# Altium PCB M_Tas3.PcbDoc (part 1 of 2)
Units mm, origin at the board's own origin, x right, y up, seen from the top; angles counter-clockwise.
Board outline 100.84 x 81.79 mm, 2 copper layers (Top Layer, Bottom Layer); 78 components, 39 nets, 214 pads, 61 vias.
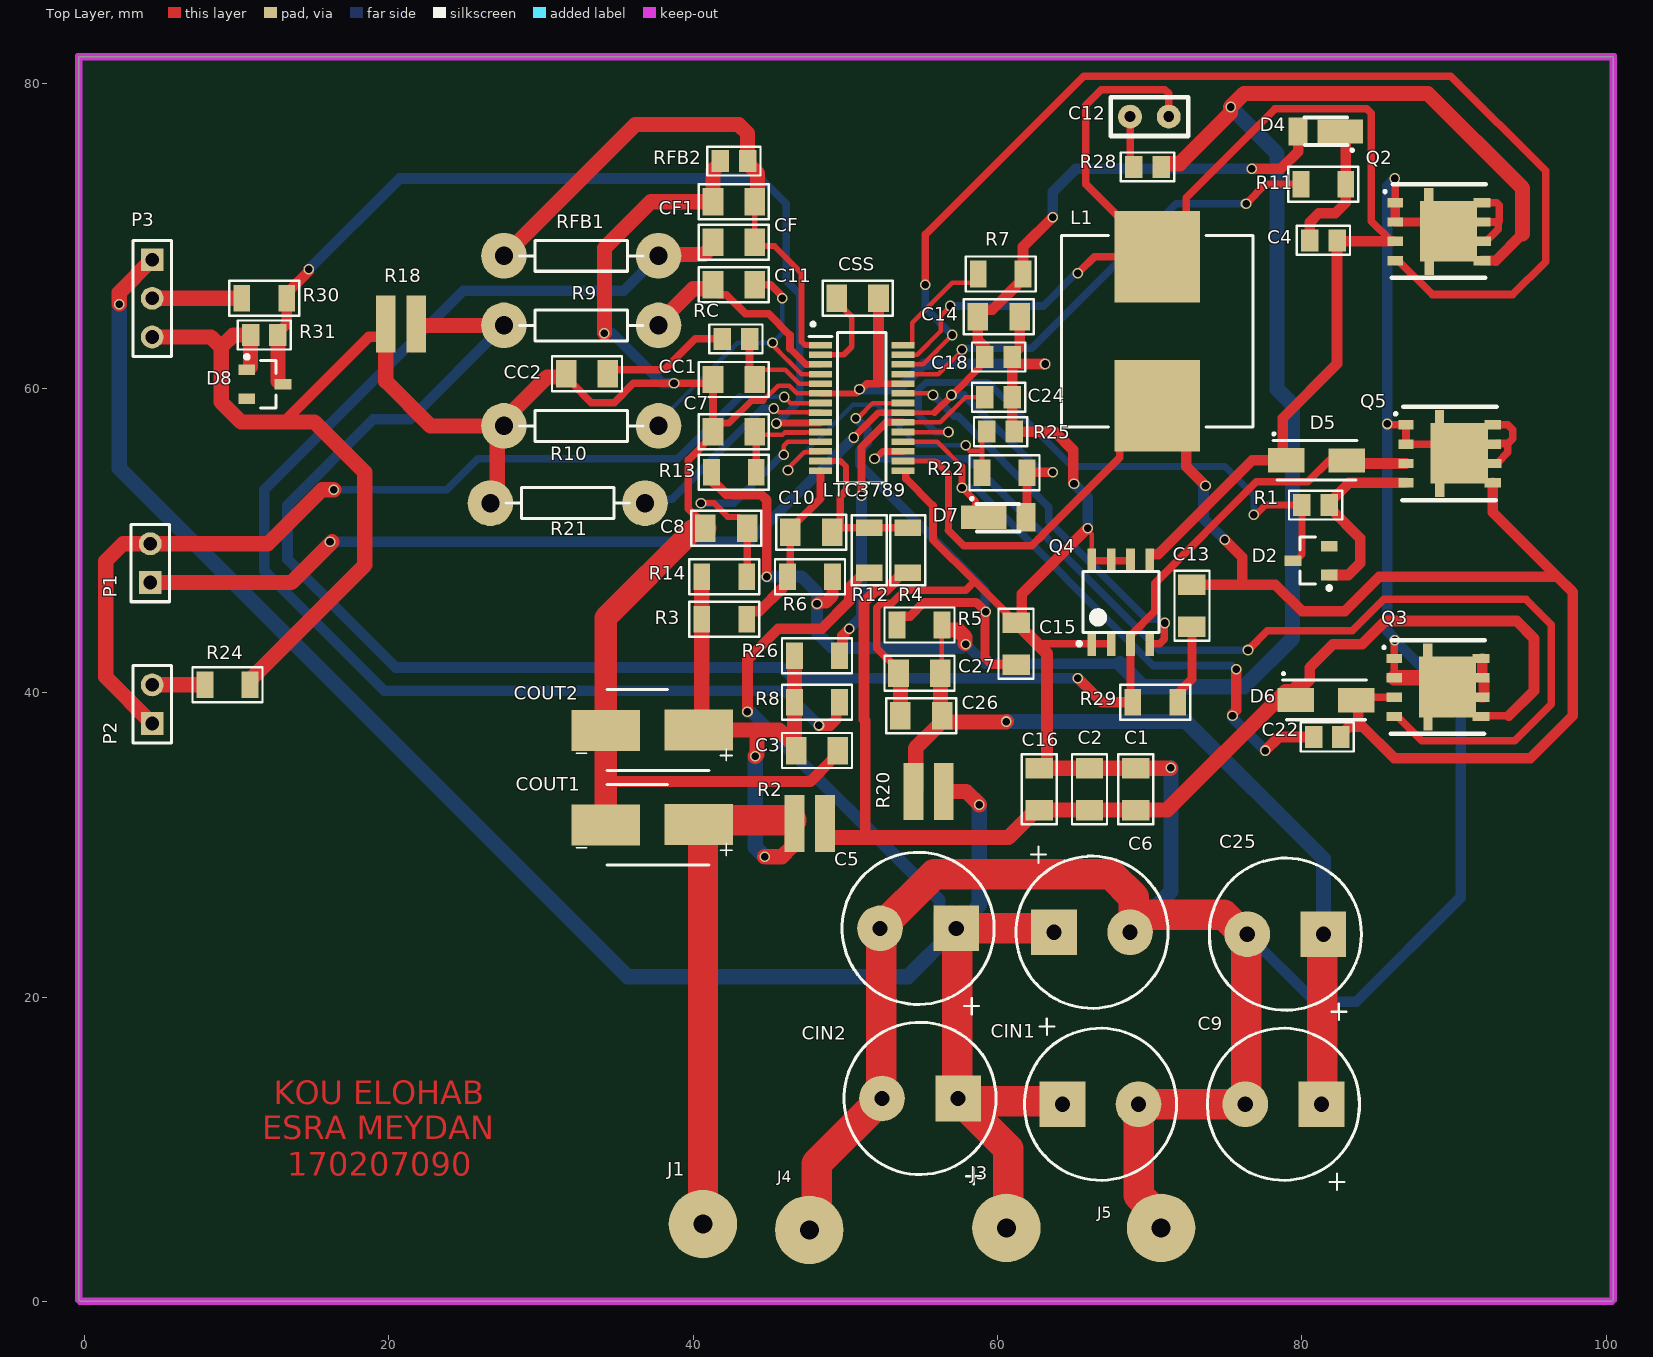
[diagram p0: Top Layer view]
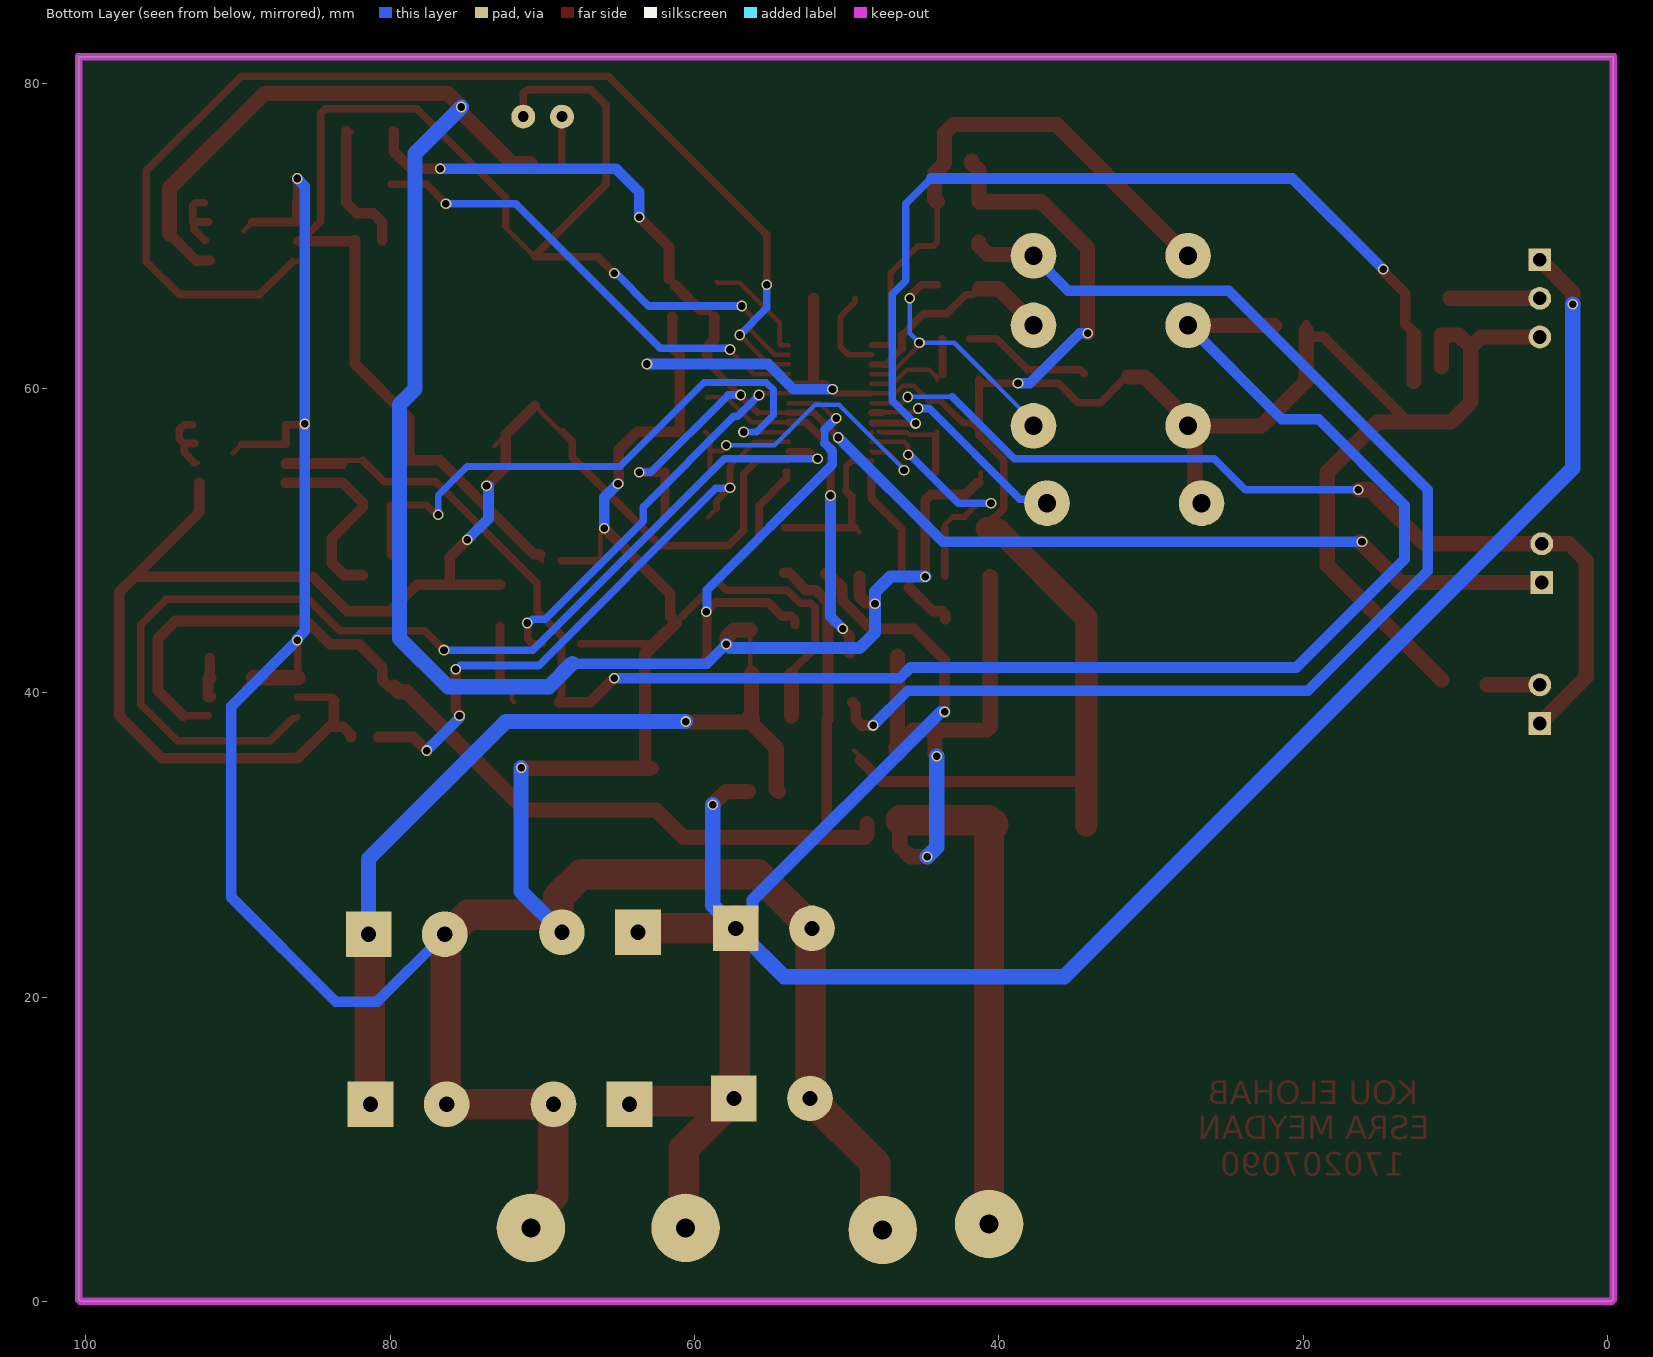
[diagram p1: Bottom Layer view, seen from below]
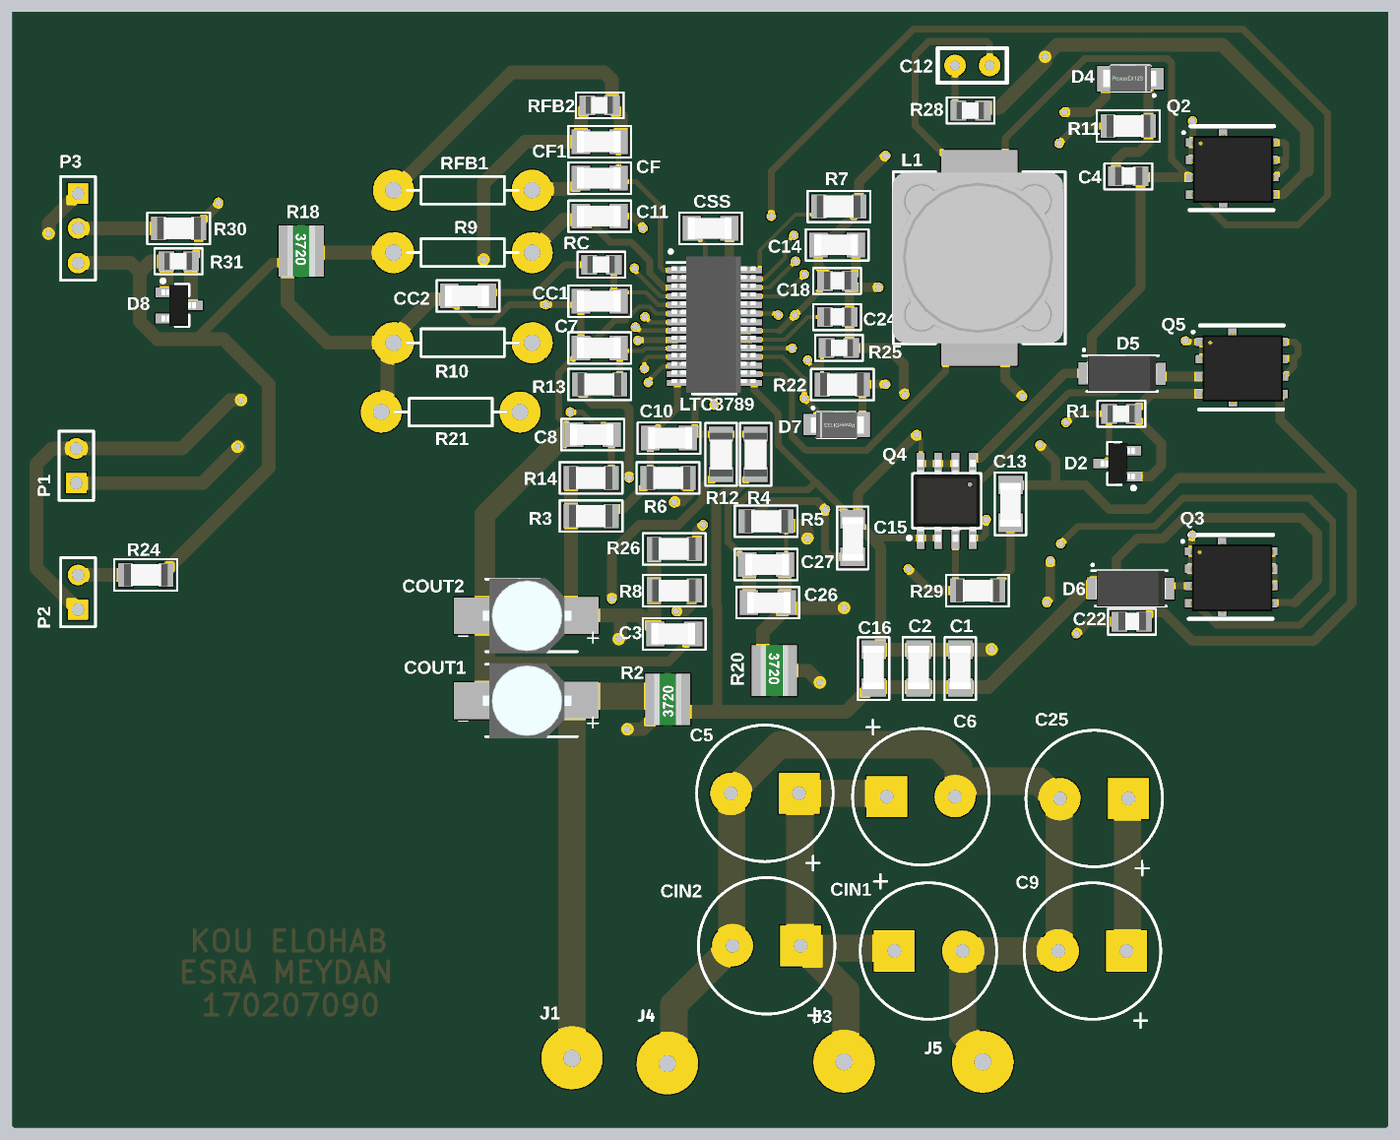
[diagram p2: 3D render of the assembled board from above, using the file's embedded part models]

## Layer stack, top to bottom
Top Solder: solder mask 0.0102, Solder Resist, Dk 3.5
Top Layer: signal copper 0.0356
Dielectric 1: dielectric 0.32, FR-4, Dk 4.8
Bottom Layer: signal copper 0.0356
Bottom Solder: solder mask 0.0102, Solder Resist, Dk 3.5

## Board outline
-0.254,0 -0.381,0.127 -0.381,81.788 100.457,81.788 100.457,0.127 100.33,0

## Design rules (kind name [scope] priority, off if disabled: settings)
Clearance [All] p1: gap=0.254 ignorepadtopadclearanceinfootprint=FALSE
PolygonConnect [All] p1: connectstyle=Relief reliefconductorwidth=0.254 reliefentries=4 polygonreliefangle="90 Angle" airgapwidth=0.254
RoutingVias [All] p1: holewidth=0.711 width=1.27 viastyle="Through Hole" minholewidth=0.711 minwidth=1.27 maxholewidth=0.711 maxwidth=1.27
ShortCircuit [All] p1: allowed=TRUE
SolderMaskExpansion [All] p1: expansion=0.102 istentingtop=FALSE
Width [All] p1: maxlimit=2 minlimit=0.3 preferedwidth=0.3
29 further rules are at their usual default settings.

## Components (designator, comment, footprint, x,y, rotation, side; value= is the part's Value field where it differs from the comment)
C1 "22uF" CAPC3216X190N(1206) 69.088,33.655 r270 top
C2 "22uF" CAPC3216X190N(1206) 66.04,33.655 r270 top
C3 "100nF opt" CAPC3216X190N(1206) 48.133,36.195 r0 top
C4 "220nF" CAPC2012X14N(0805) 81.407,69.723 r0 top value=100nF
C5 "3.3uF" RAD5X10X16 57.277,24.511 r180 top
C6 "3.3uF" RAD5X10X16 63.707,24.257 r0 top
C7 "100nF opt" CAPC3216X190N(1206) 42.672,57.15 r0 top
C8 "100nF opt" CAPC3216X190N(1206) 42.164,50.8 r0 top
C9 "3.3uF" RAD5X10X16 81.28,12.954 r180 top
C10 "2.2uF" CAPC3216X190N(1206) 47.752,50.546 r180 top
C11 "100nF opt" CAPC3216X190N(1206) 42.672,66.802 r0 top
C12 "390pF" 2.54X5.5MM 68.707,77.851 r0 top value=220pF
C13 "1800pF" CAPC3216X190N(1206) 72.771,45.72 r90 top
C14 "0.1uF" CAPC3216X190N(1206) 60.071,64.696 r0 top
C15 "1uF" CAPC3216X190N(1206) 61.214,43.222 r90 top
C16 "22uF" CAPC3216X190N(1206) 62.738,33.655 r270 top
C18 "10uF" CAPC2012X14N(0805) 60.071,62.054 r0 top value=100nF
C22 "220nF" CAPC2012X14N(0805) 81.661,37.084 r0 top value=100nF
C24 "1uF" CAPC2012X14N(0805) 60.071,59.411 r0 top value=100nF
C25 "3.3uF" RAD5X10X16 81.407,24.13 r180 top
C26 "100nF opt" CAPC3216X190N(1206) 54.991,38.481 r180 top
C27 "100nF opt" CAPC3216X190N(1206) 54.864,41.275 r180 top
CC1 "1nF" CAPC3216X190N(1206) 42.672,60.579 r0 top
CC2 "10nF" CAPC3216X190N(1206) 33.02,60.96 r0 top
CF "100nF opt" CAPC3216X190N(1206) 42.672,69.596 r0 top
CF1 "100nF opt" CAPC3216X190N(1206) 42.672,72.263 r0 top
CIN1 "270uF" RAD5X10X16 64.262,12.954 r0 top
CIN2 "opt" RAD5X10X16 57.404,13.335 r180 top
COUT1 "330uF" OSCON 36.322,31.623 r180 top
COUT2 "330uF opt" OSCON 36.322,37.846 r180 top
CSS "10nF" CAPC3216X190N(1206) 50.8,65.913 r0 top
D2 "BAS16" BZX5V1/SOT23 81.788,47.728 r180 top
D4 "DFLS160" DFLS160 81.026,77.597 r180 top
D5 "B240A" B240A 79.883,55.056 r0 top
D6 "B240A" B240A 80.516,39.297 r0 top
D7 "DFLS160" DFLS160 60.579,50.8 r0 top
D8 "BZX5V1" BZX5V1/SOT23 10.668,61.214 r0 top
J1 "VOUT" I/O 40.64,5.08 r0 top
J3 "VIN" I/O 60.579,4.826 r0 top
J4 "GND" I/O 47.625,4.699 r0 top
J5 "GND" I/O 70.739,4.826 r0 top
L1 "4.7uH" 4.7UH 70.485,63.754 r270 top
LTC3789 "LTC3789" LTC3789 47.625,62.738 r0 top
P1 "Header 2" HDR1X2 4.318,47.244 r90 top
P2 "Header 2" HDR1X2 4.445,37.973 r90 top
P3 "Header 3" HDR1X3 4.445,68.453 r270 top
Q2 "Si7884" MOSFET 87.757,68.326 r0 top
Q3 "SIR410" MOSFET 87.69,38.372 r0 top
Q4 "Si4840" SOIC-8-SI4840 66.294,42.672 r90 top
Q5 "SIR410" MOSFET 88.459,53.721 r0 top
R1 "5.6" RESC2013X70N(0805) 80.899,52.324 r180 top
R2 "0.01" SUSUMU 46.482,33.147 r0 top
R3 "100" RESC3216X84N(1206) 42.037,44.831 r180 top value=100K
R4 "100" RESC3216X84N(1206) 54.102,49.354 r270 top value=100K
R5 "15" RESC3216X84N(1206) 54.864,44.45 r0 top value=100K
R6 "10 opt" RESC3216X84N(1206) 47.674,47.625 r0 top value=100K
R7 "100K" RESC3216X84N(1206) 60.198,67.515 r180 top
R8 "10" RESC3216X84N(1206) 48.133,39.37 r180 top value=100K
R9 "1.2K" AXIAL0.4 27.559,64.135 r0 top
R10 "1.2K" AXIAL0.4 27.559,57.531 r0 top
R11 "10" RESC3216X84N(1206) 81.407,73.406 r0 top value=100K
R12 "10 opt" RESC3216X84N(1206) 51.562,49.354 r270 top value=100K
R13 "100" RESC3216X84N(1206) 42.672,54.483 r180 top value=100K
R14 "100" RESC3216X84N(1206) 42.037,47.625 r180 top value=100K
R18 "0.01" SUSUMU 21.971,62.484 r180 top
R20 "0.004" SUSUMU 56.642,31.75 r180 top
R21 "121K" AXIAL0.4 26.67,52.451 r0 top
R22 "10 opt" RESC3216X84N(1206) 60.452,54.458 r180 top value=100K
R24 "10K" RESC3216X84N(1206) 9.398,40.513 r0 top value=100K
R25 "0" RESC2013X70N(0805) 60.198,57.15 r0 top
R26 "10" RESC3216X84N(1206) 48.133,42.418 r180 top value=100K
R28 "5.6" RESC2013X70N(0805) 69.85,74.549 r180 top
R29 "3.6" RESC3216X84N(1206) 70.358,39.37 r0 top value=100K
R30 "33K" RESC3216X84N(1206) 11.811,65.913 r0 top value=100K
R31 "12.1K" RESC2013X70N(0805) 11.811,63.5 r180 top
RC "14.7K" RESC2013X70N(0805) 42.799,63.246 r180 top
RFB1 "113K" AXIAL0.4 37.719,68.707 r180 top
RFB2 "8.2K" RESC2013X70N(0805) 42.672,74.93 r180 top

## Footprints (in the part's own frame and the unit in brackets; to place one, negate y for a bottom-side part, rotate by r counter-clockwise, add the part's x,y. Pads: shape width x height; smd on the part's side, far side on the other; paste and mask are expansions set on the pad)
2.54X5.5MM [mil] "Body 5X2.54mm, Pitch:2.54mm"
  round 62 hole 28: 1(0,0) 2(100,0)
  silkscreen extent -50,-50 150,50
4.7UH [mm] "Precision Wire Wound Inductor, 2-Leads, Body 12,60x10,00mm, IPC Medium Density"
  rect 6x5.6 smd: 1(-4.9,0) 2(4.9,0)
  silkscreen extent -6.3,-6.3 6.3,6.3, body extent -6.25,-6.35 6.25,6.15, height 6
AXIAL0.4 [mm] "body:3.5 X 10 mm( D  x L ) Pitch:10.16 mm (400mil)"
  round 3 hole 1.2: 1(0,0) 2(10.16,0)
  silkscreen extent 1.02,-1.02 9.14,1.02
B240A [mm]
  rect 2.4x1.6 smd: 1(-0.93,0.225) 2(3.05,0.2)
  silkscreen extent -1.8,-1.08 3.72,1.99, body extent -1.52,-1.08 3.67,1.53, height 2.3
BZX5V1/SOT23 [mm] "SOT23, 3-Leads, Body 2,95x2,48mm, Pitch 0,95mm, IPC Medium Density"
  rect 1.1x0.7 smd: 1(0,0) 2(0,-1.9) 3(2.38,-0.95)
  silkscreen extent -0.13,-2.5 1.91,0.97, body extent -0.1,-2.45 2.4,0.55, height 1.05
CAPC2012X14N(0805) [mm] "Chip Capacitor, 2-Leads, Body 2,00x1,25mm, IPC Medium Density"
  rect 1.15x1.45 smd: 1(-0.9,0) 2(0.9,0)
  silkscreen extent -1.75,-0.95 1.75,0.95, body extent -0.97,-0.63 1.03,0.68, height 0.73
CAPC3216X190N(1206) [mm] "Chip Capacitor, 2-Leads, Body 3,20x1,60mm, IPC Medium Density"
  rect 1.35x1.8 smd: 1(-1.375,0) 2(1.375,0)
  silkscreen extent -2.3,-1.15 2.3,1.15, body extent -1.67,-0.78 1.53,0.78, height 1.83
DFLS160 [mm]
  rect 2.99x1.56 smd: 1(-1.475,0.725)
  rect 1.25x1.85 smd: 2(1.275,0.725)
  silkscreen extent -2.33,-0.2 0.85,2, body extent -2.42,-0.26 1.45,1.67, height 1.25
HDR1X2 [mm] "Connector; Header; 2 Position"
  rect 1.5x1.5 hole 0.9: 1(0,0)
  round 1.5 hole 0.9: 2(2.54,0)
  silkscreen extent -1.27,-1.27 3.81,1.27
HDR1X3 [mm] "Connector; Header; 3 Position"
  rect 1.5x1.5 hole 0.9: 1(0,0)
  round 1.5 hole 0.9: 2(2.54,0) 3(5.08,0)
  silkscreen extent -1.27,-1.27 6.35,1.27
I/O [mm]
  round 4.5 hole 1.25: 1(0,0)
LTC3789 [mm]
  rect 1.526x0.435 smd: 1(0.738,0.103) 2(0.738,-0.533) 3(0.738,-1.167) 4(0.738,-1.803) 5(0.738,-2.437) 6(0.738,-3.073) 7(0.738,-3.707) 8(0.738,-4.343) 9(0.738,-4.977) 10(0.738,-5.613) 11(0.738,-6.247) 12(0.738,-6.883) 13(0.738,-7.517) 14(0.738,-8.153) 15(6.162,-8.153) 16(6.162,-7.517) 17(6.162,-6.883) 18(6.162,-6.247) 19(6.162,-5.613) 20(6.162,-4.977) 21(6.162,-4.343) 22(6.162,-3.707) 23(6.162,-3.073) 24(6.162,-2.437) 25(6.162,-1.803) 26(6.162,-1.167) 27(6.162,-0.533) 28(6.162,0.103)
  silkscreen extent -0.02,-8.97 5.05,1.58, body extent 0.3,-8.88 6.49,1.1, height 1.75
MOSFET [mm]
  rect 1x0.61 smd: 1(-1.625,3.875) 2(-1.625,2.605) 3(-1.625,1.335) 4(-1.625,0.065)
  rect 1.1x0.61 smd: 5(4.075,0.065) 6(4.1,1.335) 7(4.075,2.605) 8(4.075,3.875)
  rect 0.61x1.1 smd: ""(0.575,4.3) ""(0.6,-0.325)
  rect 3.76x3.98 smd: ""(1.875,2)
  silkscreen extent -2.35,-1.08 4.33,5.07, body extent -1.75,-0.65 4.4,4.5, height 1.04
OSCON [mm]
  rect 4.5x2.7 smd: 1(-4.025,0.3) 2(2.075,0.325)
  silkscreen extent -6.25,-2.35 4,2.95, body extent -4.27,-2.42 2.23,3.08, height 5.5
RAD5X10X16 [mm] "Capacitor, Electrolytic, Radial; Body 10 x 16 mm (Dia.xL typ); Pin Spacing 5 mm (typ)"
  rect 3x3 hole 1: 1(0,0)
  round 3 hole 1: 2(5,0)
  silkscreen extent -2.5,-5 7.5,5.64
RESC2013X70N(0805) [mm] "Chip Resistor, 2-Leads, Body 2,00x1,25mm, IPC Medium Density"
  rect 1.15x1.45 smd: 1(-0.9,0) 2(0.9,0)
  silkscreen extent -1.75,-0.95 1.75,0.95, body extent -0.97,-0.63 1.03,0.63, height 0.43
RESC3216X84N(1206) [mm] "Chip Resistor, 2-Leads, Body 3,20x1,60mm, IPC Medium Density"
  rect 1.1x1.75 smd: 1(-1.475,0) 2(1.475,0)
  silkscreen extent -2.3,-1.15 2.3,1.15, body extent -1.58,-0.83 1.62,0.83, height 0.53
SOIC-8-SI4840 [mm] "SOIC, 8-Leads, Body 4,90x3,90mm, Pitch 1,27mm, IPC Medium Density"
  rect 1.6x0.57 smd: 1(0.55,0.1) 2(0.55,-1.17) 3(0.55,-2.44) 4(0.55,-3.71) 5(6,-3.71) 6(6,-2.44) 7(6,-1.17) 8(6,0.1)
  silkscreen extent 0.43,-4.31 5.27,1.06, body extent 0.27,-4.31 6.27,0.69, height 1.75
SUSUMU [mm]
  rect 1.3x3.75 smd: 1(0.175,-1.75) 2(2.175,-1.75)
  body extent 0.17,-3.62 2.17,0.12, height 1

## Part data
C1 C2 C3 C7 C8 C10 C11 C13 C14 C15 C16 C26 C27 CC1 CC2 CF CF1 CSS: library part VJ1206G475KXQTW1BC, "CAPACITOR CERAMIC, 4.7UF, 10V, X5R, 10%, 1206, FULL REEL; Product Range:VJ?W1BC Series; Capacitance:4.7 F; Capacitance Tolerance: 10%; Dielectric Characteristic:X5R; Voltage Rating:10V; Ceramic Capacitor Case:1206 [3216 Metric] ;RoHS Compliant: Yes", Capacitance=4.7uF, Case Code (Metric)=3216, Case Code (Imperial)=1206, Dielectric=X5R, Dielectric Material=Tantalum, Manufacturer="Vishay Vitramon", Max Operating Temperature=85°C, Min Operating Temperature=-55°C, Package Quantity=2000, Supplier Part Number 1=77-VJ1206G475KXQTBC, Tolerance=10%, Voltage Rating (DC)=10V, Case/Package=1206, Category="Ceramic Capacitors", Component=43, ComponentLink1Description=https://datasheet.ciiva.com/11487/vjw1bcbascomseries-11487630.pdf?src-supplier=Avnet, ComponentLink1URL=https://datasheet.ciiva.com/11487/vjw1bcbascomseries-11487630.pdf?src-supplier=Avnet, Depth=1.6mm, Height=1.9mm, Lead Free="Lead Free", Length=3.2mm, Manufacturer Part Number=VJ1206G475KXQTW1BC, Mount="Surface Mount", Number of Pins=2, Packaging="Tape and Reel", Pricing 1="1=0,44000, 50=0,37200, 100=0,30800, 500=0,29900, 1000=0,29900, 2000=0,26000 (USD)", RoHS=Yes, Stock 1=1681, Supplier 1=Mouser, Termination=SMD/SMT, Width=1.6mm
C4 C18 C22 C24: library part "CAP CER 100NF", "TDK - CGA3E2X7R1H104K080AA. - CERAMIC CAPACITOR, 0.1UF, 50V, X7R, 0603, FULL REEL", Capacitance=100nF, Case Code (Metric)=1608, Case Code (Imperial)=0603, Dielectric=X7R, Manufacturer=TDK, Max Operating Temperature=125°C, Min Operating Temperature=-55°C, Package Quantity=1, Ratings=AEC-Q200, Supplier Part Number 1=810-CGA3E2X7R1H104K, Tolerance=10%, Voltage=50V, Case/Package=0603, Category="Ceramic Capacitors", Component=8, ComponentLink1Description=https://datasheet.ciiva.com/24216/cga3e2x7r1h104k080aa-266291-24216208.pdf?src-supplier=Mouser, ComponentLink1URL=https://datasheet.ciiva.com/24216/cga3e2x7r1h104k080aa-266291-24216208.pdf?src-supplier=Mouser, ComponentLink2Description=https://datasheet.ciiva.com/15192/getdatasheetpartid-715867-15192412.pdf?src-supplier=Verical, ComponentLink2URL=https://datasheet.ciiva.com/15192/getdatasheetpartid-715867-15192412.pdf?src-supplier=Verical, ComponentLink3Description=https://datasheet.ciiva.com/16500/mlccspec-automotive-general-midvoltage-en-16500693.pdf?src-supplier=Future+Electronics, ComponentLink3URL=https://datasheet.ciiva.com/16500/mlccspec-automotive-general-midvoltage-en-16500693.pdf?src-supplier=Future+Electronics, ComponentLink4Description=https://datasheet.ciiva.com/22725/1735392-22725642.pdf?src-supplier=Element14, ComponentLink4URL=https://datasheet.ciiva.com/22725/1735392-22725642.pdf?src-supplier=Element14, ComponentLink5Description=https://datasheet.ciiva.com/23803/1936565-23803084.pdf?src-supplier=Newark, ComponentLink5URL=https://datasheet.ciiva.com/23803/1936565-23803084.pdf?src-supplier=Newark, ComponentLink6Description=https://datasheet.ciiva.com/46385/1735392-46385708.pdf?src-supplier=Element14, ComponentLink6URL=https://datasheet.ciiva.com/46385/1735392-46385708.pdf?src-supplier=Element14, ComponentLink7Description=http://www.mouser.com/ds/2/212/KEM_C1012_X7R_OPENMODE_SMD-1103265.pdf?src-supplier=Mouser, ComponentLink7URL=http://www.mouser.com/ds/2/212/KEM_C1012_X7R_OPENMODE_SMD-1103265.pdf?src-supplier=Mouser, ComponentLink8URL=https://search.kemet.com/component-edge/download/datasheet/C0805F104K4RACTU.pdf?src-supplier=Digi-Key, Composition=Ceramic, Depth=0.8mm, Features="Soft Termination", Height=0.8mm, Lead Free="Lead Free", Length=1.6mm, Manufacturer Part Number="CAP CER 100NF", Mount="Surface Mount", Packaging="Tape and Reel", Pricing 1="1=0,11000, 10=0,07900, 100=0,03500, 500=0,02500, 1000=0,01900, 4000=0,01300 (USD)", Radiation Hardening=No, REACH SVHC="No SVHC", RoHS=Yes, Stock 1=5553529, Supplier 1=Mouser, Termination=SMD/SMT, Thickness=0.035inch, Voltage Rating=50V, Voltage Rating (DC)=50V, Weight=7.1E-05oz, Width=0.8mm
C5 C6 C9 C25 CIN1 CIN2: library part "CAP EL 470UF", "ALUMINUM ELECTROLYTIC CAPACITOR 100UF, 63V, 20%, RADIAL, FULL REEL; Product Range:VR Series; Capacitance:100 F; Capacitance Tolerance: 20%; Voltage Rating:63V; Diameter:10mm; Capacitor Terminals:Radial Leaded; Packaging:Tape & Reel ;RoHS Compliant: Yes", Capacitance=100uF, Case/Package=Radial, Leakage Current=189uA, Manufacturer=Nichicon, Max Operating Temperature=85°C, Min Operating Temperature=-40°C, Package Quantity=500, Ripple Current=300mA, Supplier Part Number 1=UVR1J101MPD1TD, Tolerance=20%, Voltage=63V, Category="Aluminum Electrolytic Capacitors", Component=18, ComponentLink1Description=https://datasheet.ciiva.com/11685/e-vr-11685845.pdf?src-supplier=Avnet, ComponentLink1URL=https://datasheet.ciiva.com/11685/e-vr-11685845.pdf?src-supplier=Avnet, ComponentLink2Description=https://datasheet.ciiva.com/103/e-vr-103352.pdf?src-supplier=Digi-Key, ComponentLink2URL=https://datasheet.ciiva.com/103/e-vr-103352.pdf?src-supplier=Digi-Key, ComponentLink3Description=https://datasheet.ciiva.com/14603/70187464-14603353.pdf?src-supplier=Allied+Electronics, ComponentLink3URL=https://datasheet.ciiva.com/14603/70187464-14603353.pdf?src-supplier=Allied+Electronics, ComponentLink4Description=https://datasheet.ciiva.com/16392/e-vr-16392921.pdf?src-supplier=Future+Electronics, ComponentLink4URL=https://datasheet.ciiva.com/16392/e-vr-16392921.pdf?src-supplier=Future+Electronics, ComponentLink5Description=https://datasheet.ciiva.com/46381/1758668-46381770.pdf?src-supplier=Element14, ComponentLink5URL=https://datasheet.ciiva.com/46381/1758668-46381770.pdf?src-supplier=Element14, ComponentLink6Description=https://datasheet.ciiva.com/17354/e-vr-17354940.pdf?src-supplier=Avnet+Europe, ComponentLink6URL=https://datasheet.ciiva.com/17354/e-vr-17354940.pdf?src-supplier=Avnet+Europe, ComponentLink7Description=https://datasheet.ciiva.com/7907/e-vr-7907502.pdf?src-supplier=Element14, ComponentLink7URL=https://datasheet.ciiva.com/7907/e-vr-7907502.pdf?src-supplier=Element14, Diameter=10mm, Dissipation Factor=0.1%, Height=12.5mm, Height - Seated (Max)=0.492inch, Lead Diameter=0.6mm, Lead Pitch=5mm, Length=12.5mm, Life (Hours)=2000Hour, Manufacturer Part Number="CAP EL 470UF", Mount="Through Hole,PCB", Number of Pins=2, Packaging="Tape and Reel", Pricing 1="1=0,21830, 10=0,14660, 25=0,05930, 100=0,05410, 2000=0,07080, 6000=0,06440 (USD)", Radiation Hardening=No, REACH SVHC="No SVHC", RoHS=Yes, Stock 1=105, Supplier 1=Arrow, Termination=Radial, Voltage Rating=63V, Voltage Rating (DC)=63V
C12: library part "CAP CER DISC 220PF", "KEMET 220pF Multilayer Ceramic Capacitor (MLCC) 500 V dc 10% X7R dielectric C SMT max op. temp. +125C", Capacitance=220pF, Case Code (Metric)=2012, Case Code (Imperial)=0805, Dielectric=X7R, Dielectric Material=Ceramic, Manufacturer=KEMET, Max Operating Temperature=125°C, Min Operating Temperature=-55°C, Package Quantity=1, Supplier Part Number 1=80-C0805C221KCR, Tolerance=10%, Voltage=500V, Case/Package=0805, Category="Ceramic Capacitors", Component=2, ComponentLink1Description=https://datasheet.ciiva.com/14606/70096142-14606492.pdf?src-supplier=Allied+Electronics, ComponentLink1URL=https://datasheet.ciiva.com/14606/70096142-14606492.pdf?src-supplier=Allied+Electronics, Depth=1.2mm, Dissipation Factor=2.5%, Height=1.25mm, Length=2mm, Manufacturer Part Number="CAP CER DISC 220PF", Mount="Surface Mount,PCB", Number of Pins=2, Packaging="Tape and Reel", Pricing 1="1=0,37000, 10=0,21600, 100=0,15700, 500=0,13900, 1000=0,11800, 2500=0,09500 (USD)", RoHS=Yes, Stock 1=17842, Supplier 1=Mouser, Termination=SMD/SMT, Thickness=0.055inch, Voltage Rating=500V, Voltage Rating (DC)=500V, Width=0.049inch
COUT1 COUT2: library part 16SEPC180MX, "CAP ALUM POLY 180UF 20% 16V T/H", Capacitance=180uF, Case/Package=Radial, ESR (Equivalent Series Resistance)=10mR, Leakage Current=576uA, Manufacturer=Panasonic, Max Operating Temperature=105°C, Min Operating Temperature=-55°C, Package Quantity=200, Ripple Current=5A, Supplier Part Number 1=P16295-ND, Tolerance=20%, Voltage=16V, Category="Polymer Capacitors", Component=58, ComponentLink1Description=https://datasheet.ciiva.com/25746/1734355-25746218.pdf?src-supplier=Farnell, ComponentLink1URL=https://datasheet.ciiva.com/25746/1734355-25746218.pdf?src-supplier=Farnell, ComponentLink2Description=https://datasheet.ciiva.com/24068/sepc-os-262388-24068492.pdf?src-supplier=Mouser, ComponentLink2URL=https://datasheet.ciiva.com/24068/sepc-os-262388-24068492.pdf?src-supplier=Mouser, ComponentLink3Description=https://datasheet.ciiva.com/22746/1734355-22746349.pdf?src-supplier=Element14, ComponentLink3URL=https://datasheet.ciiva.com/22746/1734355-22746349.pdf?src-supplier=Element14, Diameter=8mm, Dissipation Factor=10%, Height=9mm, Height - Seated (Max)=0.354inch, Lead Diameter=0.6mm, Lead Pitch=3.5mm, Length=9mm, Life (Hours)=5000Hour, Manufacturer Part Number=16SEPC180MX, Mount="Through Hole", Number of Pins=9, Packaging=Bulk, Polarity=Polar, Pricing 1="1=1,03000, 10=0,78500, 50=0,65180, 100=0,56130, 500=0,43452, 1000=0,37417, 2500=0,35003, 5000=0,33193 (USD)", REACH SVHC="No SVHC", RoHS=Yes, Stock 1=64, Supplier 1=Digi-Key, Termination=Radial, Voltage Rating=16V, Voltage Rating (DC)=16V
D2 Q2 Q3 Q5: library part SIR410DP-T1-GE3, "MOSFET 20V 35A 36W", Continuous Drain Current (ID)=35A, Drain to Source Breakdown Voltage=20V, Drain to Source Resistance=5mR, Manufacturer="Vishay Siliconix", Max Operating Temperature=150°C, Max Power Dissipation=36W, Min Operating Temperature=-55°C, Package Quantity=1, Power Dissipation=4.2W, Supplier Part Number 1=SIR410DP-T1-GE3CT-ND, Threshold Voltage=1.2V, Input Capacitance=1.6nF, Category=MOSFETs, ComponentLink1Description=https://datasheet.ciiva.com/6376/sir410d-6376914.pdf?src-supplier=Digi-Key, ComponentLink1URL=https://datasheet.ciiva.com/6376/sir410d-6376914.pdf?src-supplier=Digi-Key, ComponentLink2Description=https://datasheet.ciiva.com/4438/sir410d-280000-4438492.pdf?src-supplier=Mouser, ComponentLink2URL=https://datasheet.ciiva.com/4438/sir410d-280000-4438492.pdf?src-supplier=Mouser, Drain to Source Voltage (Vdss)=20V, Element Configuration=Single, Fall Time=15ns, Gate to Source Voltage (Vgs)=20V, Height=1.04mm, Lead Free="Lead Free", Length=4.9mm, Manufacturer Part Number=SIR410DP-T1-GE3, Mount="Surface Mount", Number of Channels=1, Number of Pins=8, Packaging="Tape and Reel", Pricing 1="1=1,02000, 10=0,91500, 25=0,86800, 100=0,65100, 500=0,55180, 1000=0,44950 (USD)", Radiation Hardening=No, Rds On Max=4.8mR, REACH SVHC=Unknown, Rise Time=15ns, RoHS=Yes, Stock 1=7964, Supplier 1=Digi-Key, Turn-Off Delay Time=30ns, Turn-On Delay Time=25ns, Weight=0.01787oz, Width=5.89mm
  D2: Component=8, Number of Contacts=0, Number of Elements=0, Number of Positions=0, Number of Rows=0, Number of Unidirectional Channels=0
  Q2 Q3 Q5: Component=27, Number of Elements=1
D4 D7: library part DFLS160Q-7, "DIODE SCHOTTKY 60V 1A POWERDI123", Average Rectified Current=01:00:00, Forward Voltage=500mV, Manufacturer=Diodes, Max Forward Surge Current (Ifsm)=50A, Max Operating Temperature=150°C, Max Repetitive Reverse Voltage (Vrrm)=60V, Max Reverse Current=100uA, Min Operating Temperature=-65°C, Package Quantity=3000, Supplier Part Number 1=DFLS160Q-7DICT-ND, Category="Rectifier Diodes", Component=11, ComponentLink1Description=http://www.mouser.com/ds/2/115/DFLS160Q-335693.pdf?src-supplier=Mouser, ComponentLink1URL=http://www.mouser.com/ds/2/115/DFLS160Q-335693.pdf?src-supplier=Mouser, ComponentLink2Description=http://diodes.com/datasheets/DFLS160Q.pdf?src-supplier=Avnet, ComponentLink2URL=http://diodes.com/datasheets/DFLS160Q.pdf?src-supplier=Avnet, ComponentLink3Description=https://www.diodes.com/assets/Datasheets/DFLS160Q.pdf?src-supplier=Digi-Key, ComponentLink3URL=https://www.diodes.com/assets/Datasheets/DFLS160Q.pdf?src-supplier=Digi-Key, Element Configuration=Single, Forward Current=01:00:00, Manufacturer Part Number=DFLS160Q-7, Max Reverse Voltage (DC)=60V, Mount="Surface Mount", Number of Contacts=0, Number of Elements=0, Number of Pins=123, Number of Positions=0, Number of Rows=0, Number of Unidirectional Channels=0, Packaging="Tape and Reel", Pricing 1="1=0,66000, 10=0,58300, 100=0,39770, 500=0,33230, 1000=0,28280 (USD)", RoHS=Yes, Stock 1=17360, Supplier 1=Digi-Key
D5 D6: library part B240-13-F, "DIODES INC. - B240-13-F - Schottky Rectifier, 40 V, 2 A, Single, DO-214AA (SMB), 2 Pins, 500 mV", Average Rectified Current=02:00:00, Capacitance=200pF, Case/Package=SMB, Current=2A, Forward Voltage=500mV, Manufacturer=Diodes, Max Forward Surge Current (Ifsm)=50A, Max Operating Temperature=150°C, Max Repetitive Reverse Voltage (Vrrm)=40V, Max Reverse Current=500uA, Min Operating Temperature=-65°C, Package Quantity=3000, Supplier Part Number 1=B240-FDICT-ND, Category="Schottky Diodes", Component=12, ComponentLink1Description=https://datasheet.ciiva.com/913/ds13004-913158.pdf?src-supplier=Digi-Key, ComponentLink1URL=https://datasheet.ciiva.com/913/ds13004-913158.pdf?src-supplier=Digi-Key, ComponentLink2Description=https://datasheet.ciiva.com/16201/ds13004-16201032.pdf?src-supplier=Future+Electronics, ComponentLink2URL=https://datasheet.ciiva.com/16201/ds13004-16201032.pdf?src-supplier=Future+Electronics, ComponentLink3Description=https://datasheet.ciiva.com/15144/getdatasheetpartid-91432-15144684.pdf?src-supplier=Verical, ComponentLink3URL=https://datasheet.ciiva.com/15144/getdatasheetpartid-91432-15144684.pdf?src-supplier=Verical, Contact Plating=Tin,Matte, Current Rating=2A, Element Configuration=Single, Forward Current=02:00:00, Height=2.62mm, Lead Free="Lead Free", Length=4.57mm, Manufacturer Part Number=B240-13-F, Max Reverse Voltage (DC)=40V, Mount="Surface Mount", Number of Contacts=0, Number of Elements=0, Number of Pins=2, Number of Positions=0, Number of Rows=0, Number of Unidirectional Channels=0, Output Current=02:00:00, Packaging="Tape and Reel", Peak Non-Repetitive Surge Current=50A, Polarity=Standard, Pricing 1="1=0,41000, 10=0,30800, 100=0,14650, 500=0,12978, 1000=0,10100 (USD)", Radiation Hardening=No, REACH SVHC="No SVHC", RoHS=Yes, Stock 1=76580, Supplier 1=Digi-Key, Termination=SMD/SMT, Voltage=40V, Voltage Rating (DC)=40V, Weight=0.00328oz, Width=3.94mm
D8: library part BZX84B5V1LT1G, "Diode Zener Single 5.1V 2% 300mW 3-Pin SOT-23 T/R", Case/Package=SOT-23-3, Forward Voltage=900mV, Manufacturer="ON Semiconductor", Max Operating Temperature=150°C, Max Power Dissipation=225mW, Max Reverse Current=2uA, Min Operating Temperature=-65°C, Package Quantity=3000, Power Dissipation=300mW, Supplier Part Number 1=BZX84B5V1LT1GOSCT-ND, Test Current=5mA, Tolerance=2%, Voltage Rating (DC)=5.1V, Zener Current=10mA, Category="Zener Diodes", Component=9, ComponentLink1Description=https://datasheet.ciiva.com/15142/getdatasheetpartid-38799-15142007.pdf?src-supplier=Verical, ComponentLink1URL=https://datasheet.ciiva.com/15142/getdatasheetpartid-38799-15142007.pdf?src-supplier=Verical, ComponentLink2Description=https://datasheet.ciiva.com/894/bzx84c2v4lt1-d-894869.pdf?src-supplier=Digi-Key, ComponentLink2URL=https://datasheet.ciiva.com/894/bzx84c2v4lt1-d-894869.pdf?src-supplier=Digi-Key, ComponentLink3Description=https://datasheet.ciiva.com/16542/bzx84c2v4lt1-d-16542005.pdf?src-supplier=Avnet+Asia, ComponentLink3URL=https://datasheet.ciiva.com/16542/bzx84c2v4lt1-d-16542005.pdf?src-supplier=Avnet+Asia, ComponentLink4Description=https://datasheet.ciiva.com/894/bzx84c2v4lt1-d-894870.pdf?src-supplier=Digi-Key, ComponentLink4URL=https://datasheet.ciiva.com/894/bzx84c2v4lt1-d-894870.pdf?src-supplier=Digi-Key, ComponentLink5Description=https://datasheet.ciiva.com/10637/bzx84c2v4lt1-d-10637782.pdf?src-supplier=Avnet, ComponentLink5URL=https://datasheet.ciiva.com/10637/bzx84c2v4lt1-d-10637782.pdf?src-supplier=Avnet, ComponentLink6Description=https://datasheet.ciiva.com/894/bzx84c2v4lt1-d-894871.pdf?src-supplier=Digi-Key, ComponentLink6URL=https://datasheet.ciiva.com/894/bzx84c2v4lt1-d-894871.pdf?src-supplier=Digi-Key, ComponentLink7Description=https://datasheet.ciiva.com/16419/bzx84c2v4lt1-d-16419770.pdf?src-supplier=Future+Electronics, ComponentLink7URL=https://datasheet.ciiva.com/16419/bzx84c2v4lt1-d-16419770.pdf?src-supplier=Future+Electronics, ComponentLink8Description=https://datasheet.ciiva.com/26092/bzx84c2v4lt1-d-26092127.pdf?src-supplier=Avnet+Europe, ComponentLink8URL=https://datasheet.ciiva.com/26092/bzx84c2v4lt1-d-26092127.pdf?src-supplier=Avnet+Europe, Contact Plating=Tin,Matte, Element Configuration=Single, ESD Protection=Yes, Halogen Free="Halogen Free", Height=0.94mm, Lead Free="Lead Free", Length=2.9mm, Manufacturer Part Number=BZX84B5V1LT1G, Material=Plastic, Max Reverse Leakage Current=2uA, Number of Contacts=0, Number of Elements=0, Number of Pins=3, Number of Positions=0, Number of Rows=0, Number of Unidirectional Channels=0, Packaging="Tape and Reel", Power Rating=225mW, Pricing 1="1=0,17000, 10=0,14600, 100=0,05620, 500=0,04680, 1000=0,02750 (USD)", Radiation Hardening=No, REACH SVHC="No SVHC", RoHS=Yes, Stock 1=57037, Supplier 1=Digi-Key, Voltage Tolerance=2%, Width=1.3mm, Working Voltage=5.1V, Zener Voltage=5.1V, Impedance=60R
J1 J3 J4 J5: library part 78B03ST, "SWITCH SLIDE DIP SPST 150MA 30V", Current Rating=150mA, Manufacturer=Grayhill, Max Operating Temperature=85°C, Max Voltage Rating (DC)=30V, Min Operating Temperature=-40°C, Supplier Part Number 1=GH7182-ND, Actuator Type="Slide (Standard)", Body Material=Thermoplastic, Category="DIP Switches", Component=4, ComponentLink1Description=https://datasheet.ciiva.com/16405/dip-series-78-spst-4pst-16405784.pdf?src-supplier=Future+Electronics, ComponentLink1URL=https://datasheet.ciiva.com/16405/dip-series-78-spst-4pst-16405784.pdf?src-supplier=Future+Electronics, ComponentLink2Description=https://datasheet.ciiva.com/16198/63dip-series-78-spst-4pst-16198539.pdf?src-supplier=Onlinecomponents.com, ComponentLink2URL=https://datasheet.ciiva.com/16198/63dip-series-78-spst-4pst-16198539.pdf?src-supplier=Onlinecomponents.com, ComponentLink3Description=https://datasheet.ciiva.com/2865/series78dip-2865725.pdf?src-supplier=Digi-Key, ComponentLink3URL=https://datasheet.ciiva.com/2865/series78dip-2865725.pdf?src-supplier=Digi-Key, ComponentLink4Description=https://datasheet.ciiva.com/15219/getdatasheetpartid-174628-15219357.pdf?src-supplier=Verical, ComponentLink4URL=https://datasheet.ciiva.com/15219/getdatasheetpartid-174628-15219357.pdf?src-supplier=Verical, ComponentLink5Description=https://datasheet.ciiva.com/14543/70216689-14543118.pdf?src-supplier=Allied+Electronics, ComponentLink5URL=https://datasheet.ciiva.com/14543/70216689-14543118.pdf?src-supplier=Allied+Electronics, Contact Material="Copper Alloy,Brass,Gold", Contact Plating=Gold, Electrical Life=2000Cycles, Manufacturer Part Number=78B03ST, Mechanical Life=2000Cycles, Mount="Through Hole,PCB", Number of Contacts=0, Number of Elements=0, Number of Positions=0, Number of Rows=0, Number of Unidirectional Channels=0, Orientation=Straight, Packaging=Rail/Tube, Pricing 1="1=1,27000, 10=1,22500, 25=1,15160, 100=0,99470, 250=0,90652, 500=0,84280, 1000=0,78400, 2500=0,71050, 5000=0,66150 (USD)", RoHS=Yes, Stock 1=495, Supplier 1=Digi-Key, Termination="PC Pins", Throw Configuration=SPST, Voltage Rating (DC)=30V
L1: library part IHLP2525CZER4R7M01, "Inductor Power Shielded Wirewound 4.7uH 20% 100KHz 5.5A 40mOhm DCR 2525 T/R", Case Code (Metric)=6363, Case Code (Imperial)=2525, Current Rating=5.5A, DC Resistance (DCR)=40mR, Manufacturer="Vishay Dale", Max DC Current=10A, Max Operating Temperature=125°C, Min Operating Temperature=-55°C, Package Quantity=2000, Self Resonant Frequency=5MHz, Supplier Part Number 1=541-1010-1-ND, Test Frequency=100kHz, Tolerance=20%, alan=3, Case/Package=2525, Category="Fixed Inductors", ComponentLink1Description=https://datasheet.ciiva.com/5706/1671361-5706705.pdf?src-supplier=Farnell, ComponentLink1URL=https://datasheet.ciiva.com/5706/1671361-5706705.pdf?src-supplier=Farnell, ComponentLink2Description=https://datasheet.ciiva.com/11798/0900766b8102c934-11798179.pdf?src-supplier=RSComponents, ComponentLink2URL=https://datasheet.ciiva.com/11798/0900766b8102c934-11798179.pdf?src-supplier=RSComponents, ComponentLink3Description=https://datasheet.ciiva.com/26793/ihlp2525czer4r7m01-26793547.pdf?src-supplier=IIIC, ComponentLink3URL=https://datasheet.ciiva.com/26793/ihlp2525czer4r7m01-26793547.pdf?src-supplier=IIIC, ComponentLink4Description=https://datasheet.ciiva.com/17247/lp25cz01-17247205.pdf?src-supplier=Avnet+Europe, ComponentLink4URL=https://datasheet.ciiva.com/17247/lp25cz01-17247205.pdf?src-supplier=Avnet+Europe, ComponentLink5Description=https://datasheet.ciiva.com/16335/lp25cz01-16335799.pdf?src-supplier=Future+Electronics, ComponentLink5URL=https://datasheet.ciiva.com/16335/lp25cz01-16335799.pdf?src-supplier=Future+Electronics, ComponentLink6Description=https://datasheet.ciiva.com/7290/ihlp25cz-7290185.pdf?src-supplier=Newark, ComponentLink6URL=https://datasheet.ciiva.com/7290/ihlp25cz-7290185.pdf?src-supplier=Newark, ComponentLink7Description=https://datasheet.ciiva.com/8495/lp25cz01-8495083.pdf?src-supplier=Avnet, ComponentLink7URL=https://datasheet.ciiva.com/8495/lp25cz01-8495083.pdf?src-supplier=Avnet, ComponentLink8Description=https://datasheet.ciiva.com/16940/70201586-16940508.pdf?src-supplier=Allied+Electronics, ComponentLink8URL=https://datasheet.ciiva.com/16940/70201586-16940508.pdf?src-supplier=Allied+Electronics, ComponentLink9Description=https://datasheet.ciiva.com/26821/getdatasheetpartid-74581-26821228.pdf?src-supplier=Verical, ComponentLink9URL=https://datasheet.ciiva.com/26821/getdatasheetpartid-74581-26821228.pdf?src-supplier=Verical, Contact Plating=Tin,Matte, Core Material=Metal,Composite,Ferrite, Depth=6.72mm, Height=3mm, Height - Seated (Max)=0.118inch, Lead Free="Lead Free", Length=7.24mm, Manufacturer Part Number=IHLP2525CZER4R7M01, Military Standard=Not, Mount="Surface Mount", Number of Pins=2, Packaging="Tape and Reel", Pricing 1="1=1,10000, 10=1,01700, 25=0,93920, 50=0,78260, 100=0,73560, 250=0,65732, 500=0,56340, 1000=0,50080 (USD)", Radiation Hardening=No, REACH SVHC=Unknown, RMS Current (Irms)=5.5A, RoHS=Yes, Saturation Current=10A, Shielding=Shielded, Stock 1=66868, Supplier 1=Digi-Key, Termination=SMD/SMT, Width=0.255inch, Inductance=4.7uH, Inductance Tolerance=20%
LTC3789: library part LTC3789EGN#PBF, "DC DC Cntrlr Dual-OUT Synchronous Boost/Buck Controller 4V to 38V Input Automotive 28-Pin SSOP N", Case/Package=SSOP, Manufacturer="Analog Devices / Linear Technology", Max Frequency=710kHz, Max Operating Temperature=125°C, Max Supply Voltage=38V, Min Operating Temperature=-40°C, Min Supply Voltage=4V, Output Current=20A, Package Quantity=49, Supplier Part Number 1=LTC3789EGN#PBF-ND, Category="Voltage Regulators - Switching", Component=26, ComponentLink1Description=https://datasheet.ciiva.com/14151/ltc3789-eng-ds-14151002.pdf?src-supplier=Distrelec, ComponentLink1URL=https://datasheet.ciiva.com/14151/ltc3789-eng-ds-14151002.pdf?src-supplier=Distrelec, ComponentLink2Description=https://datasheet.ciiva.com/15267/53789fb-15267774.pdf?src-supplier=Arrow+Europe, ComponentLink2URL=https://datasheet.ciiva.com/15267/53789fb-15267774.pdf?src-supplier=Arrow+Europe, ComponentLink3Description=https://datasheet.ciiva.com/26893/ltc3789egn-pbf-26893678.pdf?src-supplier=IIIC, ComponentLink3URL=https://datasheet.ciiva.com/26893/ltc3789egn-pbf-26893678.pdf?src-supplier=IIIC, ComponentLink4Description=https://datasheet.ciiva.com/6192/1865679-6192839.pdf?src-supplier=Farnell, ComponentLink4URL=https://datasheet.ciiva.com/6192/1865679-6192839.pdf?src-supplier=Farnell, ComponentLink5Description=https://datasheet.ciiva.com/7906/1865679-7906007.pdf?src-supplier=Element14, ComponentLink5URL=https://datasheet.ciiva.com/7906/1865679-7906007.pdf?src-supplier=Element14, ComponentLink6Description=https://datasheet.ciiva.com/7906/1511849-7906151.pdf?src-supplier=Element14, ComponentLink6URL=https://datasheet.ciiva.com/7906/1511849-7906151.pdf?src-supplier=Element14, ComponentLink7Description=https://datasheet.ciiva.com/2015/30095-2015247.pdf?src-supplier=Digi-Key, ComponentLink7URL=https://datasheet.ciiva.com/2015/30095-2015247.pdf?src-supplier=Digi-Key, Duty Cycle=98%, Manufacturer Part Number=LTC3789EGN#PBF, Number of Outputs=1, Number of Pins=28, Output Type=Adjustable, Output Voltage=38V, Packaging=Rail/Tube, Pricing 1="1=11,59000, 25=7,69960, 100=6,36480, 250=6,04656, 500=5,90954 (USD)", REACH SVHC="No SVHC", RoHS=Yes, Stock 1=809, Supplier 1=Digi-Key, Switching Frequency=710kHz
P1 P2: "Header, 2-Pin", LatestRevisionDate=17-Jul-2002, LatestRevisionNote="Re-released for DXP Platform.", Publisher="Altium Limited"
P3: "Header, 3-Pin", LatestRevisionDate=17-Jul-2002, LatestRevisionNote="Re-released for DXP Platform.", Publisher="Altium Limited"
Q4: library part SI4840DY-T1-E3, "MOSFET N-CH 40V 10A 8-SOIC", Case/Package=SO, Continuous Drain Current (ID)=10A, Drain to Source Breakdown Voltage=40V, Drain to Source Resistance=9mR, Gate to Source Voltage (Vgs)=20V, Manufacturer="Vishay Siliconix", Max Operating Temperature=150°C, Max Power Dissipation=1.56W, Min Operating Temperature=-55°C, Package Quantity=2500, Supplier Part Number 1=35K3476, Category=MOSFETs, Component=30, ComponentLink1Description=https://datasheet.ciiva.com/945/71188-945204.pdf?src-supplier=Digi-Key, ComponentLink1URL=https://datasheet.ciiva.com/945/71188-945204.pdf?src-supplier=Digi-Key, ComponentLink2Description=https://datasheet.ciiva.com/17084/si4840dy-t1-e3-17084039.pdf?src-supplier=Allied+Electronics, ComponentLink2URL=https://datasheet.ciiva.com/17084/si4840dy-t1-e3-17084039.pdf?src-supplier=Allied+Electronics, ComponentLink3Description=https://datasheet.ciiva.com/26790/si4840dy-t1-e3-26790652.pdf?src-supplier=IIIC, ComponentLink3URL=https://datasheet.ciiva.com/26790/si4840dy-t1-e3-26790652.pdf?src-supplier=IIIC, ComponentLink4Description=https://datasheet.ciiva.com/945/71188-945206.pdf?src-supplier=Digi-Key, ComponentLink4URL=https://datasheet.ciiva.com/945/71188-945206.pdf?src-supplier=Digi-Key, ComponentLink5Description=https://datasheet.ciiva.com/18403/70026069-18403703.pdf?src-supplier=Allied+Electronics, ComponentLink5URL=https://datasheet.ciiva.com/18403/70026069-18403703.pdf?src-supplier=Allied+Electronics, Drain to Source Voltage (Vdss)=40V, Element Configuration=Single, Fall Time=20ns, Height=1.55mm, Lead Free="Lead Free", Length=5mm, Manufacturer Part Number=SI4840DY-T1-E3, Mount="Surface Mount", Number of Channels=1, Number of Elements=1, Number of Pins=8, Packaging="Tape and Reel", Power Dissipation=1.56W, Rds On Max=9mR, Rise Time=10ns, RoHS=Yes, Supplier 1=Newark, Turn-Off Delay Time=50ns, Turn-On Delay Time=15ns, Voltage Rating (DC)=40V, Weight=0.006596oz, Width=4mm
R1 R25 R28 R31: library part RC2012J473AS, "Res Thick Film 0805 47K Ohm 5% 1/8W ±100ppm/°C Molded SMD T/R", Case/Package=0805, Manufacturer=Samsung, Max Operating Temperature=155°C, Min Operating Temperature=-55°C, Power Rating=125mW, Resistance=47kR, Temperature Coefficient=100ppm/°C, Tolerance=5%, Voltage Rating (DC)=150V, Category="Chip SMD Resistors", Component=15, ComponentLink1Description=https://sem.samsung.co.kr/servlet/DownloadServletWS?dir=/kr/product/&num=&fileName=Resistor_General.pdf&src-supplier=Avnet, ComponentLink1URL=https://sem.samsung.co.kr/servlet/DownloadServletWS?dir=/kr/product/&num=&fileName=Resistor_General.pdf&src-supplier=Avnet, ComponentLink2Description=https://sem.samsung.co.kr/servlet/DownloadServletWS?dir=/kr/product/&num=&fileName=Resistor_General.pdf&src-supplier=Avnet+Europe, ComponentLink2URL=https://sem.samsung.co.kr/servlet/DownloadServletWS?dir=/kr/product/&num=&fileName=Resistor_General.pdf&src-supplier=Avnet+Europe, Composition="Thick Film", Contact Plating=Tin, Lead Free="Lead Free", Manufacturer Part Number=RC2012J473AS, Mount="Surface Mount", Number of Contacts=0, Number of Elements=0, Number of Positions=0, Number of Rows=0, Number of Unidirectional Channels=0, RoHS=Yes, Supplier 1=Avnet, Supplier Part Number 1=RC2012J473AS
R2 R18 R20: library part RL1220S-R50-F, "SUSUMU         RL1220S-R50-F             SMD Current Sense Resistor, 0.5 ohm, 0805 [2012 Metric], 250 mW,  1%, RL Series", Case Code (Metric)=2012, Case Code (Imperial)=0805, Manufacturer=Susumu, Max Operating Temperature=125°C, Max Power Dissipation=333mW, Min Operating Temperature=-55°C, Package Quantity=1, Power Rating=250mW, Resistance=500mR, Resistor Type="Thin Film", Supplier Part Number 1=RL12S.50FCT-ND, Temperature Coefficient=200ppm/°C, Tolerance=1%, Voltage Rating (DC)=100V, Case/Package=0805, Category="Chip SMD Resistors", Component=26, ComponentLink1Description=https://datasheet.ciiva.com/2487/rl-data-sheet-2487714.pdf?src-supplier=Digi-Key, ComponentLink1URL=https://datasheet.ciiva.com/2487/rl-data-sheet-2487714.pdf?src-supplier=Digi-Key, ComponentLink2Description=https://datasheet.ciiva.com/2487/rl-data-sheet-2487715.pdf?src-supplier=Digi-Key, ComponentLink2URL=https://datasheet.ciiva.com/2487/rl-data-sheet-2487715.pdf?src-supplier=Digi-Key, ComponentLink3Description=https://datasheet.ciiva.com/2487/rl-data-sheet-2487716.pdf?src-supplier=Digi-Key, ComponentLink3URL=https://datasheet.ciiva.com/2487/rl-data-sheet-2487716.pdf?src-supplier=Digi-Key, ComponentLink4Description=https://datasheet.ciiva.com/12837/e-15-16-12837656.pdf?src-supplier=Mouser, ComponentLink4URL=https://datasheet.ciiva.com/12837/e-15-16-12837656.pdf?src-supplier=Mouser, ComponentLink5Description=https://datasheet.ciiva.com/7984/87305-7984266.pdf?src-supplier=Element14, ComponentLink5URL=https://datasheet.ciiva.com/7984/87305-7984266.pdf?src-supplier=Element14, Height=0.02inch, Lead Free="Lead Free", Length=0.079inch, Manufacturer Part Number=RL1220S-R50-F, Number of Contacts=0, Number of Elements=0, Number of Pins=2, Number of Positions=0, Number of Rows=0, Number of Terminations=2, Number of Unidirectional Channels=0, Packaging="Tape and Reel", Pricing 1="1=0,29000, 10=0,24300, 25=0,17640, 50=0,12780, 100=0,09480, 250=0,07276, 500=0,05734, 1000=0,03969 (USD)", REACH SVHC=Unknown, RoHS=Yes, Stock 1=218491, Supplier 1=Digi-Key, Termination=SMD/SMT, Weight=0.000194oz, Width=0.049inch
R3 R4 R5 R6 R7 R8 R11 R12 R13 R14 R22 R24 R26 R29 R30: library part "RES  56K 1/4W", "Resistor,Metal Glaze,56KOhms,200WV,5+/-% Tol,-200,200ppm-TC,1206-Case ;RoHS Compliant: Yes", Case Code (Metric)=3216, Case Code (Imperial)=1206, Manufacturer="Vishay Dale", Max Operating Temperature=155°C, Max Power Dissipation=250mW, Min Operating Temperature=-55°C, Package Quantity=5000, Resistance=56kR, Supplier Part Number 1=71-CRCW1206J-56K-E3, Temperature Coefficient=200ppm/°C, Tolerance=5%, Voltage Rating=200V, Case/Package=1206, Category="Chip SMD Resistors", Component=2, ComponentLink1Description=https://datasheet.ciiva.com/2496/dcrcwe3-2496448.pdf?src-supplier=Digi-Key, ComponentLink1URL=https://datasheet.ciiva.com/2496/dcrcwe3-2496448.pdf?src-supplier=Digi-Key, ComponentLink2Description=https://datasheet.ciiva.com/2496/dcrcwe3-2496449.pdf?src-supplier=Digi-Key, ComponentLink2URL=https://datasheet.ciiva.com/2496/dcrcwe3-2496449.pdf?src-supplier=Digi-Key, ComponentLink3Description=https://datasheet.ciiva.com/2496/dcrcwe3-2496450.pdf?src-supplier=Digi-Key, ComponentLink3URL=https://datasheet.ciiva.com/2496/dcrcwe3-2496450.pdf?src-supplier=Digi-Key, ComponentLink4Description=https://datasheet.ciiva.com/8999/dcrcwe3-8999045.pdf?src-supplier=Avnet, ComponentLink4URL=https://datasheet.ciiva.com/8999/dcrcwe3-8999045.pdf?src-supplier=Avnet, ComponentLink5Description=https://datasheet.ciiva.com/8999/dcrcwe3-8999051.pdf?src-supplier=Avnet, ComponentLink5URL=https://datasheet.ciiva.com/8999/dcrcwe3-8999051.pdf?src-supplier=Avnet, Composition="Thick Film", Contact Plating=Tin, Depth=1.6mm, Features="Automotive AEC-Q200", Height=0.55mm, Height - Seated (Max)=0.024inch, Lead Free="Lead Free", Length=3.2mm, Manufacturer Part Number="RES  56K 1/4W", Military Standard=Not, Number of Pins=2, Number of Terminations=2, Packaging="Tape and Reel", Power Rating=250mW, Pricing 1="1=0,10000, 10=0,07300, 100=0,02900, 1000=0,01200, 5000=0,00800, 10000=0,00700 (USD)", Radiation Hardening=No, REACH SVHC=Unknown, RoHS=Yes, Stock 1=9995, Supplier 1=Mouser, Voltage Rating (DC)=200V, Weight=0.000353oz, Width=0.063inch, Working Voltage=200V
R9 R10 R21 RFB1: library part CRCW0805270RFKEA, "Resistor; Thick Film; 270 Ohms; 0.125 W; 1%; SMT; 0805; TCR 37 ppm/DegC; Tape and Reel", Case Code (Metric)=2012, Case Code (Imperial)=0805, Manufacturer=Vishay, Max Operating Temperature=155°C, Min Operating Temperature=-55°C, Package Quantity=5000, Power Rating=125mW, Resistance=270R, Resistor Type="Thick Film", Supplier Part Number 1=541-270CCT-ND, Temperature Coefficient=100ppm/°C, Tolerance=1%, Voltage Rating=150V, Case/Package=0805, Category="Chip SMD Resistors", Component=30, ComponentLink1Description=https://datasheet.ciiva.com/11811/0900766b80d98b26-11811341.pdf?src-supplier=RSComponents, ComponentLink1URL=https://datasheet.ciiva.com/11811/0900766b80d98b26-11811341.pdf?src-supplier=RSComponents, ComponentLink2Description=https://datasheet.ciiva.com/5541/dcrcwe3-109170-5541253.pdf?src-supplier=Mouser, ComponentLink2URL=https://datasheet.ciiva.com/5541/dcrcwe3-109170-5541253.pdf?src-supplier=Mouser, ComponentLink3Description=https://datasheet.ciiva.com/16775/70201119-16775622.pdf?src-supplier=Allied+Electronics, ComponentLink3URL=https://datasheet.ciiva.com/16775/70201119-16775622.pdf?src-supplier=Allied+Electronics, ComponentLink4Description=https://datasheet.ciiva.com/8951/dcrcwe3-8951175.pdf?src-supplier=Avnet, ComponentLink4URL=https://datasheet.ciiva.com/8951/dcrcwe3-8951175.pdf?src-supplier=Avnet, ComponentLink5Description=https://datasheet.ciiva.com/8951/dcrcwe3-8951176.pdf?src-supplier=Avnet, ComponentLink5URL=https://datasheet.ciiva.com/8951/dcrcwe3-8951176.pdf?src-supplier=Avnet, ComponentLink6Description=https://datasheet.ciiva.com/17164/dcrcwe3-17164846.pdf?src-supplier=Avnet+Europe, ComponentLink6URL=https://datasheet.ciiva.com/17164/dcrcwe3-17164846.pdf?src-supplier=Avnet+Europe, ComponentLink7Description=https://datasheet.ciiva.com/26317/fld-crcw-e3-data-en-26317342.pdf?src-supplier=Distrelec, ComponentLink7URL=https://datasheet.ciiva.com/26317/fld-crcw-e3-data-en-26317342.pdf?src-supplier=Distrelec, Contact Plating=Tin, Depth=1.25mm, Height=0.45mm, Lead Free="Lead Free", Length=2mm, Manufacturer Part Number=CRCW0805270RFKEA, Military Standard=Not, Mount="Surface Mount", Number of Contacts=0, Number of Elements=0, Number of Positions=0, Number of Rows=0, Number of Unidirectional Channels=0, Packaging="Tape and Reel", Pricing 1="1=0,10000, 10=0,05700, 100=0,02310, 1000=0,01039, 2500=0,00902 (USD)", Radiation Hardening=No, REACH SVHC=Unknown, RoHS=Yes, Stock 1=8827, Supplier 1=Digi-Key, Termination=SMD/SMT, Voltage Rating (DC)=150V, Weight=0.000194oz, Width=1.25mm
RC RFB2: library part ERJ-P06F25R5V, "Res Thick Film 0805 25.5 Ohm 1% 1/4W 300ppm/C Molded SMD Punched Carrier T/R", Case Code (Imperial)=155°C, Case/Package=0805, Manufacturer=Panasonic, Min Operating Temperature=400V, Power Rating1=500mW, Resistance=2mm, Resistance1=25.5R, Resistor Type="Thick Film", Supplier Part Number 1=85Y6938, Temperature Coefficient1=300ppm/°C, Tolerance=0.6mm, Voltage Rating (DC)=2012, Category="Chip SMD Resistors", Component=21, ComponentLink7Description="No SVHC", Composition=https://datasheet.ciiva.com/24032/aoa0000ce4-64075-24032358.pdf?src-supplier=Mouser, Contact Plating=1%, Height=150V, Length="Tape and Reel", Manufacturer Part Number=ERJ-P06F25R5V, Max Power Dissipation=https://datasheet.ciiva.com/22799/1801181-22799275.pdf?src-supplier=Farnell, Military Standard=0805, Mount="Surface Mount", Number of Terminations=https://datasheet.ciiva.com/22799/1801181-22799275.pdf?src-supplier=Farnell, Packaging=https://datasheet.ciiva.com/24032/aoa0000ce4-64075-24032358.pdf?src-supplier=Mouser, Pricing 1="10=0,08600, 25=0,07900, 50=0,07100, 100=0,04800, 250=0,04000, 500=0,03200, 1000=0,02200 (USD)", REACH SVHC=1.2mm, RoHS=Yes, Stock 1=2949, Supplier 1=Newark, Weight=-55°C, Width=5000

## Via types
v1: diameter 0.7, hole 0.5, Top Layer to Bottom Layer, 61 vias

## Nets (pads, with @x,y where several pads share a name; then routed paths per layer and width w, separated by ;. In a path a pad name is that pad's centre, name@x,y a point inside that pad or via, vN(x,y) a via of type N, cw(c..) or ccw(c..) an arc to the next point about the centre after c; other vN are vias at no path point)
GND: C1.1 C2.1 C3.2 C5.2 C6.2 C7.1 C8.1 C9.2 C14.2 C15.2 C16.1 C18.2 C24.2 C25.2 C26.2 C27.2 CC1.1 CC2.1 CF1.1 CIN1.2 CIN2.2 COUT1.2 COUT2.2 CSS.2 D8.1 J4.1 J5.1 LTC3789.6 LTC3789.15 LTC3789.24 P3.3 Q2.1 Q2.2 Q2.6 Q2.7 Q2.8 Q2.@89.632,70.326 Q3.1 Q3.2 Q3.6 Q3.7 Q3.8 Q3.@89.565,40.372 Q4.1 Q4.2 Q4.6 Q4.7 Q4.8 Q5.1 Q5.2 Q5.6 Q5.7 Q5.8 Q5.@90.334,55.721 R10.1 R18.2 R21.1 R24.2 R25.2 R31.2 RFB2.2 | length 464.4
  Top Layer w0.3: D8.1 10.711,61.214 D8.1@10.911,61.414 ; R24.2 R24.2@10.873,40.838 ; R21.1 R21.1@27.114,52.895 ; R10.1@27.114,57.087 R10.1 R10.1@27.559,57.911 ; C8.1 C8.1@40.789,51.025 ; C7.1@41.297,56.925 C7.1 ; 44.577,59.182 45.574,60.179 46.299,60.179 46.814,59.665 LTC3789.6 ; C3.2@49.109,35.571 49.109,35.796 C3.2 ; C27.2@53.489,41.5 C27.2 C27.2@53.616,41.148 ; LTC3789.15 53.907,54.585 LTC3789.15@53.975,54.517 ; C15.2@60.753,45.058 C15.2 ; R25.2@60.971,57.277 R25.2 ; C18.2@60.971,62.204 C18.2 60.971,62.02 C18.2@61.396,61.595 ; C15.2@61.214,44.955 61.453,45.145 61.544,44.954 C15.2@61.553,44.936 ; 62.684,43.126 62.78,43.222 ; v1@64.96,53.785 v1(65.024,53.721) ; v1(65.913,50.8) 65.913,50.692 66.194,50.411 Q4.8 ; v1@71.352,35.03 v1(71.389,35.067) ; v1(85.598,57.658) v1@85.66,57.596 ; v1@86.065,43.139 86.106,43.18 v1@86.106,43.307 ; v1(86.106,73.787) v1@86.132,73.761 ; Q3.@88.96,40.977 Q3.@89.565,40.372 ; Q2.@89.027,70.931 Q2.@89.632,70.326 ; Q5.@89.729,56.326 Q5.@90.334,55.721 ; Q3.8 Q3.8@91.849,42.247 ; Q5.6@92.618,55.115 Q5.6@92.863,55.115 ; Q5.7@92.779,56.326 Q5.7@92.825,56.372 ; 92.902,70.931 92.964,70.993
  Top Layer w0.381: v1@50.771,59.665 v1@50.988,59.883 ; 52.197,60.301 52.197,60.452
  Top Layer w0.4: LTC3789.6 v1@50.771,59.665 ; 52.197,60.301 LTC3789.24
  Top Layer w0.45: C7.1 41.41,57.263 41.41,57.384 41.747,57.722 42.355,57.722 43.815,59.182 44.577,59.182
  Top Layer w0.5: R18.2@19.396,63.393 19.796,63.793 R18.2 ; CC2.1@31.42,60.735 CC2.1 ; CC2.1@31.698,60.682 32.07,60.31 32.07,60.29 33.305,59.055 34.798,59.055 36.068,60.325 v1(38.735,60.325) 41.043,60.325 CC1.1 C7.1@41.297,57.375 ; C8.1@40.789,51.025 40.217,51.597 40.159,51.597 39.659,52.097 39.659,55.287 C7.1@41.297,56.925 ; v1@50.988,59.883 50.988,59.951 51.081,60.044 51.15,60.044 51.407,60.301 52.197,60.301 ; C27.2@53.489,41.5 52.07,42.919 52.07,45.578 52.363,45.871 53.041,45.871 53.906,46.736 57.912,46.736 58.483,47.307 ; LTC3789.15@53.975,54.517 53.975,54.075 55.753,52.297 55.753,50.038 58.483,47.307 ; C15.2@60.753,45.058 58.503,47.307 58.483,47.307 ; C15.2 C15.2@61.553,44.936 ; 62.78,43.222 Q4.1 Q4.2 ; Q4.8 Q4.7 Q4.6 ; v1@85.66,57.596 Q5.1 Q5.2 Q5.@89.729,56.326 ; Q3.2 Q3.1 v1@86.065,43.139 ; Q2.1 v1@86.132,73.761 ; Q2.7@91.916,70.931 92.902,70.931 92.902,70.461 Q2.6@92.161,69.72 ; Q2.8@92.202,72.201 92.788,72.201 92.964,72.025 92.964,70.993 ; Q5.7@92.825,56.372 93.534,56.372 ; Q5.6@92.863,55.115 93.534,55.786 93.534,56.372 ; Q5.8@92.964,57.596 93.534,57.596 93.853,57.277 93.853,56.691 93.534,56.372
  Top Layer w0.6: Q2.1 Q2.2 Q2.@89.027,70.931